# EAGLE board SmallBatSAO (EAGLE 9.1.0)
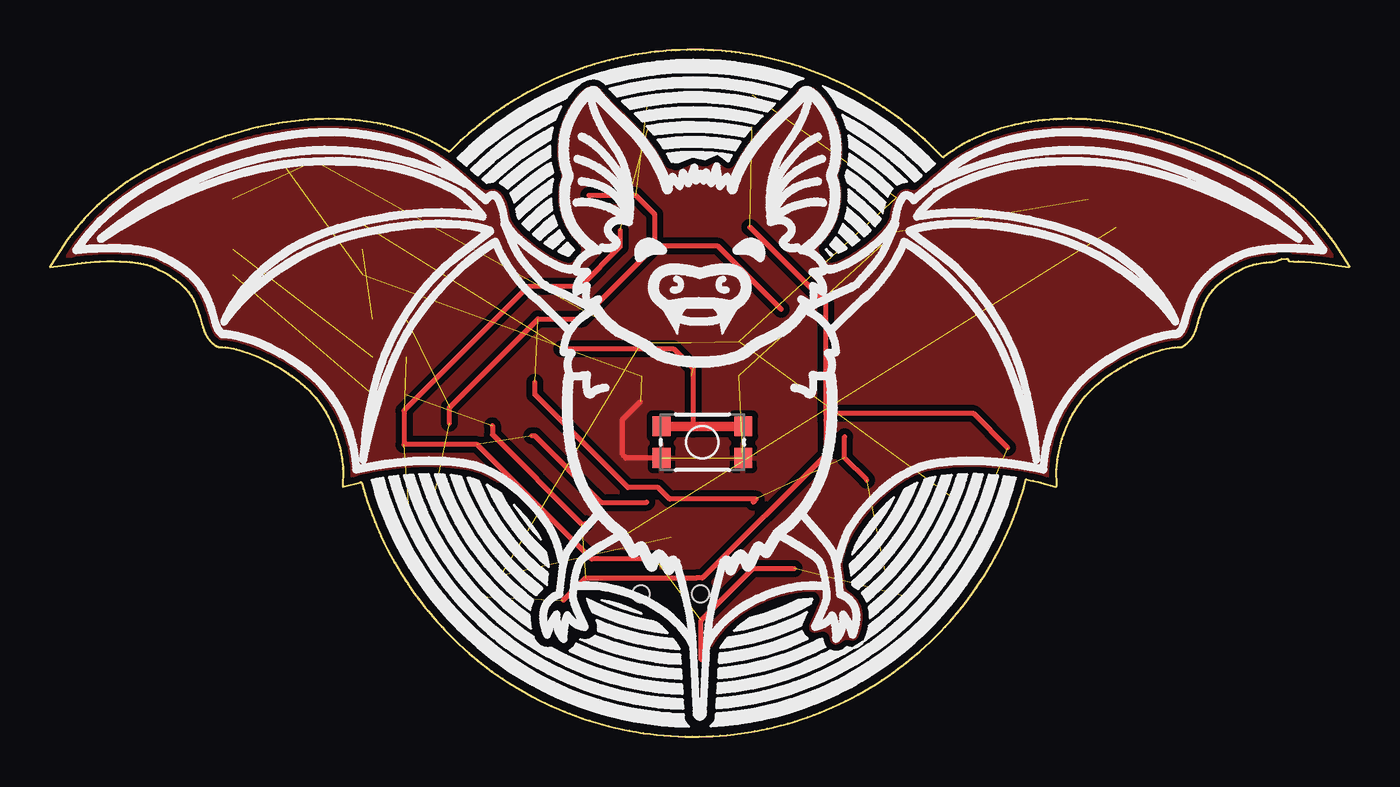
[diagram p0: board, top side]
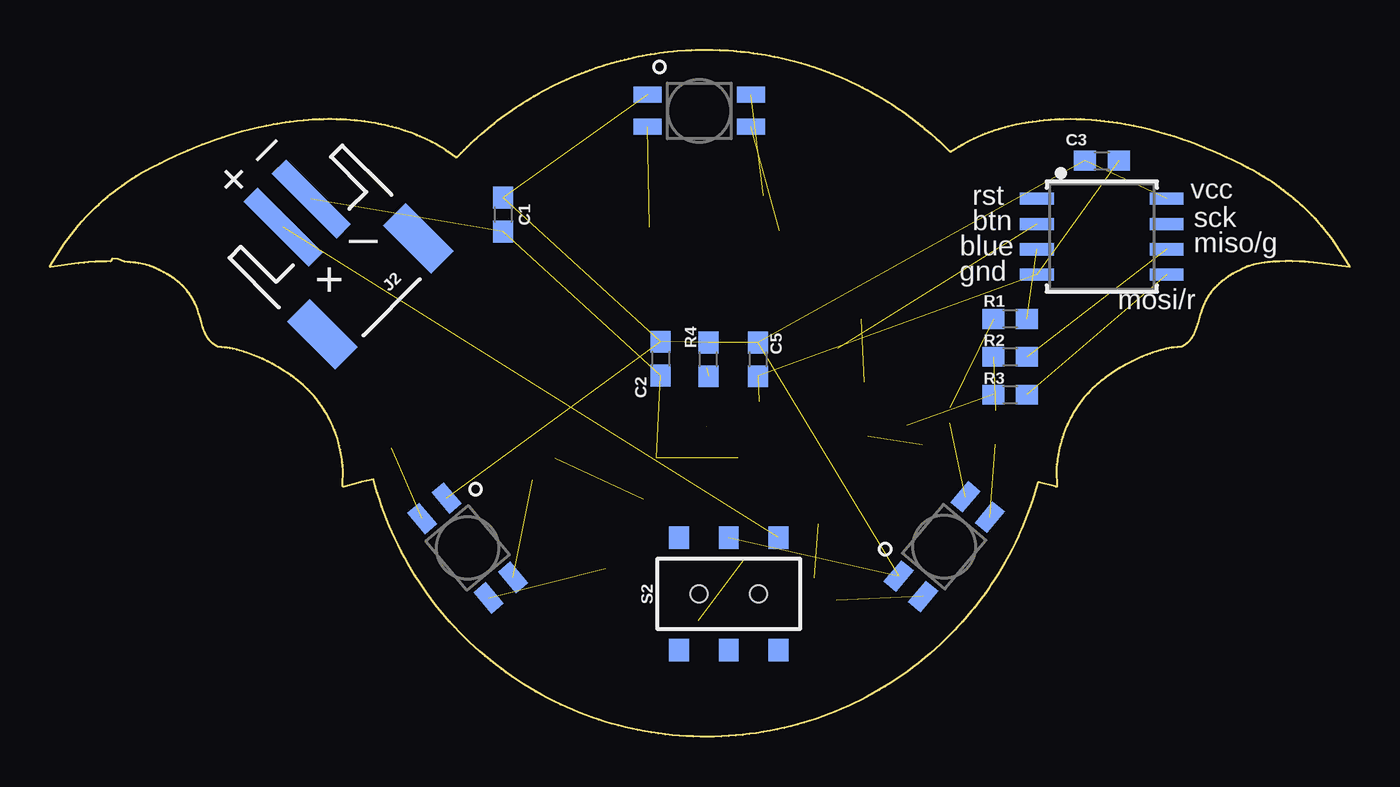
[diagram p1: board, bottom side, seen from below]

Size 65.26 x 34.5 mm. Coordinates in mm from the lower left corner, seen from the top.
Outline: 64.5,24.79 64.42,24.91 64.34,25.03 64.17,25.25 64,25.47 63.82,25.69 63.63,25.9 63.44,26.11 63.24,26.31 63.15,26.41 62.99,26.56 62.79,26.75 62.58,26.94 62.36,27.13 62.25,27.22 62.09,27.35 61.87,27.52 61.64,27.69 61.41,27.85 61.17,28.01 60.93,28.16 60.69,28.3 60.44,28.44 60.13,28.6 59.75,28.79 59.37,28.98 58.99,29.16 58.67,29.3 58.35,29.44 58.02,29.58 57.63,29.74 57.3,29.86 56.9,30 56.63,30.09 56.3,30.2 56.03,30.29 55.62,30.4 55.21,30.51 54.8,30.61 54.38,30.7 54.04,30.76 53.83,30.8 53.62,30.84 53.41,30.87 53.2,30.9 52.85,30.94 52.5,30.97 52.29,30.99 52.08,31 51.73,31.02 51.51,31.03 51.3,31.03 51.09,31.03 50.88,31.02 50.67,31.02 50.53,31.01 50.39,31 50.17,30.99 49.96,30.97 49.82,30.96 49.61,30.93 49.47,30.92 49.26,30.89 49.12,30.86 48.92,30.83 48.78,30.8 48.64,30.77 48.43,30.73 48.29,30.7 48.09,30.65 47.88,30.59 47.75,30.55 47.61,30.51 47.41,30.44 47.15,30.35 46.95,30.28 46.82,30.22 46.69,30.17 46.49,30.08 46.3,29.99 46.18,29.93 46.05,29.87 45.93,29.8 45.8,29.73 45.68,29.66 45.5,29.55 45.38,29.47 45.26,29.39 45.15,29.31 45.04,29.23 44.87,29.1 44.82,29.12 44.62,29.32 44.47,29.47 44.32,29.62 44.12,29.81 43.96,29.96 43.8,30.1 43.59,30.29 43.43,30.42 43.27,30.56 43.1,30.69 42.94,30.82 42.77,30.95 42.6,31.08 42.43,31.21 42.2,31.37 42.03,31.49 41.85,31.61 41.68,31.73 41.5,31.84 41.32,31.95 41.14,32.06 40.96,32.17 40.71,32.31 40.53,32.41 40.28,32.55 40.09,32.64 39.9,32.74 39.71,32.83 39.52,32.92 39.33,33.01 39.13,33.09 38.94,33.18 38.74,33.26 38.54,33.33 38.35,33.41 38.15,33.48 37.88,33.58 37.68,33.64 37.48,33.71 37.28,33.77 37.07,33.83 36.8,33.91 36.6,33.96 36.39,34.01 36.19,34.06 35.98,34.11 35.7,34.17 35.5,34.21 35.29,34.24 35.08,34.28 34.87,34.31 34.66,34.34 34.45,34.37 34.24,34.39 33.96,34.42 33.75,34.44 33.33,34.47 33.04,34.49 32.83,34.49 32.62,34.5 32.41,34.5 32.2,34.5 31.99,34.5 31.63,34.49 31.42,34.48 31.21,34.47 30.93,34.45 30.79,34.43 30.58,34.41 30.37,34.39 30.16,34.37 29.95,34.34 29.74,34.31 29.53,34.28 29.32,34.24 29.11,34.2 28.9,34.16 28.7,34.12 28.49,34.07 28.28,34.03 28.08,33.97 27.87,33.92 27.53,33.83 27.33,33.77 27.13,33.7 26.93,33.64 26.73,33.57 26.53,33.5 26.33,33.43 26.13,33.35 25.93,33.28 25.74,33.2 25.54,33.12 25.22,32.97 25.03,32.88 24.84,32.79 24.65,32.7 24.46,32.6 24.21,32.47 24.02,32.37 23.71,32.2 23.53,32.09 23.35,31.98 23.17,31.87 22.99,31.76 22.81,31.64 22.64,31.52 22.46,31.4 22.29,31.28 22.12,31.16 21.95,31.03 21.67,30.82 21.45,30.64 21.34,30.55 21.18,30.41 21.02,30.28 20.75,30.04 20.6,29.9 20.39,29.71 20.24,29.56 20.09,29.41 20.04,29.38 19.92,29.45 19.8,29.53 19.62,29.64 19.5,29.71 19.38,29.78 19.19,29.88 19,29.98 18.88,30.04 18.62,30.16 18.43,30.24 18.29,30.29 18.16,30.34 17.96,30.41 17.76,30.48 17.63,30.52 17.42,30.58 17.29,30.62 17.15,30.65 16.95,30.71 16.74,30.75 16.6,30.78 16.46,30.81 16.26,30.85 16.12,30.87 15.91,30.9 15.56,30.95 15.35,30.97 15.14,30.99 15,31 14.78,31.01 14.57,31.02 14.36,31.03 14.01,31.03 13.73,31.02 13.51,31.02 13.3,31.01 12.95,30.99 12.74,30.97 12.53,30.95 12.32,30.93 12.11,30.9 11.9,30.87 11.69,30.84 11.48,30.81 11.27,30.77 11.06,30.73 10.86,30.69 10.44,30.6 10.03,30.5 9.62,30.39 9.28,30.3 9.01,30.21 8.81,30.15 8.41,30.02 8.08,29.9 7.68,29.75 7.29,29.59 6.9,29.43 6.51,29.26 6.19,29.12 5.93,29 5.74,28.9 5.43,28.75 5.11,28.59 4.8,28.42 4.55,28.28 4.31,28.14 4.07,27.99 3.9,27.87 3.78,27.79 3.55,27.63 3.32,27.46 3.1,27.29 2.94,27.15 2.83,27.06 2.62,26.88 2.51,26.78 2.36,26.64 2.15,26.44 2.05,26.34 1.91,26.19 1.76,26.04 1.67,25.93 1.57,25.83 1.43,25.67 1.3,25.51 1.16,25.34 1.08,25.23 0.95,25.06 0.83,24.89 0.75,24.77 0.03,23.64 0,23.59 1.4,23.77 1.61,23.8 1.82,23.82 2.03,23.84 2.24,23.85 2.52,23.87 2.88,23.88 3.23,23.88 3.51,23.87 3.72,23.86 3.86,23.85 4,23.84 4.14,23.83 4.28,23.81 4.42,23.79 4.56,23.77 4.7,23.74 4.84,23.71 4.91,23.69 5.04,23.65 5.11,23.63 5.17,23.6 5.24,23.57 5.3,23.54 5.37,23.51 5.49,23.45 5.68,23.35 5.86,23.25 5.98,23.18 6.1,23.1 6.22,23.02 6.28,22.98 6.33,22.94 6.44,22.85 6.55,22.76 6.65,22.67 6.75,22.57 6.8,22.51 6.85,22.46 6.94,22.35 7.02,22.24 7.06,22.18 7.14,22.06 7.17,22 7.24,21.88 7.27,21.81 7.3,21.75 7.36,21.62 7.38,21.55 7.43,21.42 7.47,21.29 7.52,21.15 7.63,20.74 7.69,20.54 7.74,20.41 7.77,20.34 7.79,20.28 7.82,20.22 7.86,20.15 7.89,20.09 7.93,20.03 7.97,19.97 8.01,19.92 8.06,19.87 8.11,19.82 8.16,19.77 8.22,19.72 8.27,19.68 8.39,19.6 8.45,19.58 8.67,19.57 8.81,19.55 8.95,19.54 9.08,19.51 9.22,19.49 9.36,19.45 9.5,19.42 9.7,19.36 9.9,19.29 10.03,19.25 10.17,19.2 10.43,19.09 10.69,18.97 10.94,18.85 11.13,18.75 11.25,18.69 11.37,18.62 11.56,18.51 11.74,18.4 11.85,18.32 11.97,18.24 12.15,18.12 12.26,18.04 12.37,17.95 12.48,17.87 12.59,17.78 12.7,17.69 12.81,17.59 12.91,17.49 13.01,17.4 13.15,17.24 13.25,17.14 13.34,17.03 13.47,16.86 13.56,16.75 13.68,16.58 13.75,16.46 13.86,16.28 13.93,16.16 14,16.03 14.1,15.84 14.16,15.72 14.21,15.59 14.29,15.39 14.37,15.19 14.41,15.06 14.45,14.92 14.51,14.72 14.57,14.52 14.6,14.38 14.64,14.17 14.67,13.96 14.69,13.82 14.7,13.68 14.72,13.54 14.72,13.47 14.72,13.4 14.71,12.55 14.78,12.56 15.59,12.78 15.65,12.78 15.75,12.44 15.85,12.11 15.96,11.77 16.07,11.44 16.2,11.11 16.33,10.78 16.46,10.45 16.55,10.26 16.63,10.07 16.78,9.75 16.94,9.43 17.11,9.12 17.21,8.93 17.31,8.75 17.49,8.44 17.67,8.14 17.86,7.84 17.98,7.67 18.1,7.49 18.3,7.2 18.51,6.92 18.72,6.64 18.85,6.47 18.99,6.31 19.21,6.04 19.45,5.77 19.68,5.51 19.83,5.36 19.98,5.21 20.23,4.96 20.38,4.81 20.53,4.66 20.79,4.43 21.06,4.19 21.32,3.96 21.49,3.83 21.65,3.7 21.93,3.48 22.22,3.27 22.5,3.07 22.74,2.91 23.03,2.72 23.33,2.53 23.63,2.35 23.94,2.17 24.25,2 24.56,1.84 24.88,1.69 25.2,1.54 25.52,1.39 25.85,1.26 26.11,1.15 26.44,1.03 26.77,0.91 27.11,0.8 27.38,0.72 27.72,0.62 28.06,0.53 28.4,0.45 28.74,0.37 29.09,0.3 29.44,0.24 29.79,0.19 30.14,0.14 30.49,0.1 30.84,0.06 31.19,0.04 31.54,0.02 31.89,0.01 32.25,0 32.6,0 32.95,0.01 33.3,0.03 33.66,0.05 34.01,0.08 34.36,0.12 34.71,0.17 35.06,0.22 35.4,0.28 35.75,0.34 36.03,0.4 36.37,0.48 36.71,0.57 37.05,0.66 37.39,0.76 37.73,0.87 38.06,0.98 38.33,1.08 38.65,1.21 38.98,1.34 39.3,1.48 39.63,1.63 39.94,1.78 40.26,1.94 40.57,2.11 40.88,2.28 41.18,2.46 41.48,2.64 41.78,2.84 42.07,3.03 42.36,3.24 42.59,3.4 42.87,3.62 43.14,3.83 43.42,4.06 43.68,4.29 43.95,4.52 44.2,4.77 44.46,5.01 44.7,5.26 44.95,5.52 45.18,5.78 45.42,6.04 45.55,6.21 45.69,6.37 45.91,6.65 46.12,6.93 46.33,7.21 46.53,7.5 46.73,7.79 46.92,8.09 47.11,8.39 47.29,8.69 47.46,9 47.62,9.31 47.78,9.63 47.94,9.94 48.08,10.26 48.22,10.59 48.36,10.91 48.48,11.24 48.6,11.58 48.72,11.91 48.82,12.25 48.92,12.58 49.01,12.92 49.36,12.85 49.63,12.79 49.77,12.76 50.52,12.56 50.56,12.58 50.55,13.43 50.56,13.57 50.56,13.64 50.58,13.78 50.59,13.92 50.61,14.06 50.65,14.27 50.68,14.41 50.73,14.61 50.76,14.75 50.82,14.95 50.89,15.15 50.94,15.28 50.99,15.42 51.07,15.61 51.15,15.81 51.22,15.93 51.28,16.06 51.35,16.18 51.46,16.36 51.53,16.48 51.61,16.6 51.73,16.77 51.82,16.89 51.9,17 51.99,17.11 52.09,17.21 52.23,17.37 52.33,17.47 52.43,17.56 52.54,17.66 52.65,17.75 52.81,17.88 52.92,17.97 53.03,18.06 53.15,18.14 53.32,18.26 53.5,18.38 53.62,18.45 53.8,18.56 53.92,18.63 54.11,18.73 54.23,18.8 54.36,18.86 54.48,18.93 54.61,18.99 54.74,19.04 54.87,19.1 55,19.15 55.13,19.21 55.26,19.25 55.4,19.3 55.53,19.35 55.73,19.41 55.87,19.44 56.07,19.49 56.21,19.52 56.35,19.54 56.49,19.56 56.63,19.57 56.84,19.58 57.02,19.7 57.07,19.74 57.13,19.79 57.18,19.84 57.23,19.89 57.27,19.94 57.32,20 57.35,20.06 57.39,20.12 57.43,20.18 57.46,20.24 57.49,20.31 57.51,20.37 57.54,20.44 57.59,20.57 57.65,20.77 57.72,21.04 57.78,21.25 57.85,21.45 57.9,21.58 57.92,21.65 57.95,21.71 58.01,21.84 58.04,21.9 58.11,22.03 58.18,22.15 58.26,22.26 58.31,22.32 58.39,22.43 58.44,22.48 58.54,22.59 58.59,22.64 58.64,22.69 58.74,22.78 58.85,22.87 58.96,22.96 59.02,23 59.13,23.08 59.25,23.16 59.37,23.23 59.56,23.33 59.68,23.4 59.81,23.46 59.87,23.49 59.93,23.53 59.99,23.56 60.06,23.58 60.19,23.63 60.26,23.66 60.39,23.7 60.46,23.71 60.6,23.75 60.8,23.78 60.94,23.8 61.08,23.82 61.22,23.84 61.37,23.85 61.51,23.86 61.84,24 62.13,24 62.21,23.88 62.42,23.88 62.7,23.87 62.99,23.85 63.34,23.83 63.55,23.81 63.83,23.78 65.23,23.59 65.26,23.61 64.5,24.79
Copper layers (1*16): Top 0.035mm / dielectric 1.5mm / Bottom 0.035mm
Design rules "SparkFun-2-layer-TIGHT": minimum track width 7mil, minimum drill 15mil, track to track 7mil, track to pad 7mil, pad to pad 7mil, via to via 7mil, smd to smd 7mil, copper to edge 7mil, drill to drill 7mil, minimum pad ring 7mil, minimum via ring 7mil, stop-mask expansion 4mil, vias tented up to drill 25mil, thermal gap 10mil
tRestrict: area 40.8,31.1 to 42.6,32.2; area 22,31.1 to 23.4,32; area 39,24.2 to 40.4,24.7; area 23.7,32.2 to 25.3,33; area 20.8,30 to 21.4,30.6; area 39.3,31.1 to 40.8,32.2; area 29.2,31.1 to 31.1,32.2; area 31.1,31.1 to 33.1,32.2; area 25.3,25.8 to 25.4,26.1; area 33.1,31.1 to 35,32.2; area 25.3,28.2 to 25.3,28.2; area 28.5,31.4 to 29.2,32.2; area 40.8,30 to 42.8,31.1; area 21.4,30 to 23.4,31.1; area 35,31.1 to 36.8,32.2; area 25.3,31.1 to 26,32.2; area 23.4,31.1 to 25.3,32.2; area 39.9,30 to 40.8,31.1; area 38.9,32.2 to 40.8,33.2; area 35,30.3 to 35.7,31.1; area 40.8,32.2 to 41,32.2; area 42.8,30 to 43.9,30.9; area 25.3,30.8 to 25.4,31.1; area 23.4,30 to 25.3,31.1; area 31.1,30 to 33.1,31.1; area 33.1,30 to 35,31.1; area 44.7,29 to 44.8,29.2; area 29.6,30 to 31.1,31.1; area 37,33.2 to 38.8,33.9; area 40,26.9 to 40.8,27.9; area 42.8,27.9 to 44.7,29; area 40.8,25.8 to 42,26.9; area 40.8,26.9 to 42.8,27.9; area 21.4,29 to 23.4,30; area 20.1,29 to 21.4,30; area 20.6,28.2 to 21.4,29; area 23.4,26.9 to 25.3,27.9; area 25.3,32.2 to 27.3,33.2; area 25.8,33.2 to 27.3,33.7; area 31.1,34.3 to 33.1,34.5; area 21.8,26.9 to 23.4,27.9; area 35,33.2 to 37,34.3; area 35,34.3 to 35.1,34.3; area 33.1,34.3 to 35,34.5; area 25.3,24.7 to 26.1,25.8; area 23.7,24.7 to 25.3,25.8; area 42.8,29 to 44.7,30; area 42.8,27.8 to 43.5,27.9; area 40.8,29 to 42.8,30; area 23.4,29 to 25.2,30; area 21.4,27.9 to 23.4,29; area 40.8,27.9 to 42.8,29; area 30.5,29 to 31.1,30; area 40.8,25.1 to 41.6,25.8; area 39.2,24.7 to 40.8,25.8; area 40.1,29 to 40.8,30; area 33.1,29 to 34.8,30; area 31.1,29 to 33.1,30; area 31.1,29 to 31.1,29; area 39.9,27.9 to 40.8,29; area 25.3,24.2 to 26.3,24.7; area 23.4,25.8 to 25.3,26.9; area 24.9,24.5 to 25.3,24.7; area 34,28.9 to 34.1,29; area 35,32.2 to 37,33.2; area 31.2,28.8 to 31.9,29; area 39.8,25.8 to 40.8,26.9; area 23.3,26.6 to 23.4,26.9; area 33.1,33.2 to 35,34.3; area 37,32.3 to 38.9,33.2; area 33.1,32.2 to 35,33.2; area 27.3,32.2 to 29.2,33.2; area 31.1,32.2 to 33.1,33.2; area 29.2,33.2 to 31.1,34.3; area 29.2,32.2 to 31.1,33.2; area 29.5,34.3 to 31.1,34.5; area 27.3,33.2 to 29.2,34.2; area 23.4,27.9 to 25.3,29; area 31.1,33.2 to 33.1,34.3; area 40.8,3.6 to 42.8,4.6; area 42.8,3.6 to 44,4.6; area 44.7,7.8 to 46.7,8.9; area 35,3.6 to 37,4.6; area 42.8,7.8 to 44.7,8.9; area 19.5,4.6 to 21.4,5.7; area 46.7,7.8 to 47.4,8.9; area 38.9,3.6 to 40.8,4.6; area 37,3.6 to 38.9,4.6; area 40.8,7.8 to 42.8,8.9; area 19.5,5.7 to 21.4,6.8; area 33.6,3.6 to 35,4.6; area 17.6,7.8 to 19.5,8.9; area 21.4,5.7 to 23.4,6.8; area 27.3,5.7 to 29.2,6.8; area 29.2,5.7 to 30.5,6.4; area 23.4,5.7 to 24.2,6.8; area 19.5,7.8 to 21.4,8.9; area 15.6,12 to 17.6,13.1; area 27.3,3.6 to 29.2,4.6; area 29.2,3.6 to 31.1,4.6; area 31.1,3.6 to 31.7,4.6; area 21.4,7.8 to 23.4,8.9; area 23.4,3.6 to 25.3,4.6; area 23.4,7.8 to 25.1,8.9; area 21.4,3.6 to 23.4,4.6; area 25.3,3.6 to 27.3,4.6; area 17.9,6.8 to 19.5,7.8; area 40.8,6.8 to 42.8,7.8; area 35,0.4 to 37,1.5; area 19.5,6.8 to 21.4,7.8; area 21.4,6.8 to 23.4,7.8; area 42.8,6.8 to 44.7,7.8; area 44.7,5.3 to 45.1,5.7; area 44.7,6.8 to 46.7,7.8; area 27.3,6.8 to 28.3,6.9; area 27,6.8 to 27.3,6.9; area 25.4,0.8 to 27.3,1.5; area 27,6.2 to 27.3,6.8; area 42.8,3.6 to 42.8,3.6; area 23.4,6.8 to 25,7.8; area 40.8,2.3 to 41.3,2.5; area 37,6.8 to 38.3,6.9; area 20.6,3.9 to 21.4,4.6; area 31.1,0 to 33.1,0.4; area 29.2,0 to 31.1,0.4; area 46.7,9.9 to 48.4,11; area 17.6,9.9 to 19.5,11; area 18.6,5.7 to 19.5,6.8; area 35,0.2 to 36,0.4; area 42.4,12 to 42.8,12.3; area 33.1,0 to 35,0.4; area 28.6,0.3 to 29.2,0.4; area 40.3,7.1 to 40.8,7.8; area 46.7,7.7 to 46.7,7.8; area 17.3,8.3 to 17.6,8.9; area 46.7,13.1 to 47.8,13.2; area 27.3,0.4 to 29.2,1.5; area 17.5,13.1 to 17.5,13.1; area 40.1,7.8 to 40.8,8.9; area 44.7,9.9 to 46.7,11; area 42.8,9.9 to 44.7,11; area 44.8,13.1 to 46.7,13.2; area 40.8,9.9 to 42.8,11; area 44.7,11 to 46.7,12; area 21.4,8.9 to 23.4,9.9; area 21.4,9.9 to 23.4,11; area 19.5,9.9 to 21.4,11; area 23.4,9.9 to 24.6,11; area 40.6,9.9 to 40.8,10.3; area 17.6,12 to 19.5,13.1; area 17.6,8.9 to 19.5,9.9; area 40.8,2.5 to 42.8,3.6; area 16.7,8.9 to 17.6,9.9; area 17.6,13.1 to 19.5,13.2; area 38.9,2.5 to 40.8,3.6; area 19.5,8.9 to 21.4,9.9; area 17.6,11 to 19.5,12; area 19.5,11 to 21.4,12; area 15.9,11 to 17.6,12; area 16.3,9.9 to 17.6,11; area 44.7,12 to 46.7,13.1; area 33.8,4.6 to 35,5.7; area 31.1,4.6 to 31.5,5.1; area 42.8,11 to 44.7,12; area 29.2,4.6 to 31.1,5.7; area 42.8,12 to 44.7,13.1; area 27.3,4.6 to 29.2,5.7; area 21.4,4.6 to 23.4,5.7; area 23.4,4.6 to 24.5,5.7; area 26.4,4.6 to 27.3,5; area 41.4,11 to 42.8,12; area 19.5,13.1 to 20.4,13.2; area 21.4,11 to 23.4,12; area 23.4,11 to 23.9,11.6; area 35,4.6 to 37,5.7; area 19.5,12 to 21.4,13.1; area 21.4,12 to 22.8,12.9; area 37,4.6 to 38.9,5.7; area 42.8,4.6 to 44.7,5.7; area 40.7,4.6 to 40.8,4.7; area 40.8,4.6 to 42.8,5.7; area 40.2,8.9 to 40.8,9.9; area 46.7,12 to 48.6,13.1; area 29.2,0.4 to 31.1,1.5; area 44.7,5.7 to 46,6.8; area 33.1,0.4 to 35,1.5; area 33,0.4 to 33.1,0.4; area 31.1,0.4 to 32.2,1.5; area 23.4,1.5 to 25.3,2.5; area 23.4,2.5 to 23.4,2.5; area 23.4,2.5 to 25.3,3.6; area 48.6,12 to 49,13; area 21.8,2.5 to 23.4,3.6; area 34.8,5.7 to 35,5.9; area 37,5.7 to 38.2,6.8; area 35,5.7 to 37,6.7; area 38.9,1.3 to 39.2,1.5; area 37,0.6 to 38.9,1.5; area 35,1.5 to 37,2.5; area 37,1.5 to 38.9,2.5; area 33.5,1.5 to 35,2.5; area 41,5.7 to 42.8,6.8; area 42.8,5.7 to 44.7,6.8; area 25.3,1.5 to 27.3,2.5; area 44.7,8.9 to 46.7,9.9; area 40.8,8.9 to 42.8,9.9; area 42.8,8.9 to 44.7,9.9; area 46.7,8.9 to 47.9,9.9; area 33.5,2.5 to 35,3.6; area 35,2.5 to 37,3.6; area 38.9,1.5 to 40.8,2.5; area 25.3,2.5 to 27.3,3.6; area 23.4,8.9 to 25,9.9; area 37,2.5 to 38.9,3.6; area 48.6,11.6 to 48.8,12; area 29.2,1.5 to 31.1,2.5; area 46.7,11 to 48.6,12; area 31.1,2.5 to 31.8,3.6; area 27.3,1.5 to 29.2,2.5; area 29.2,2.5 to 31.1,3.6; area 31.1,1.5 to 31.8,2.5; area 27.3,2.5 to 29.2,3.6; area 49.3,12.8 to 49.7,12.9; area 40.8,31.1 to 42.6,32.2; area 22,31.1 to 23.4,32; area 39,24.2 to 40.4,24.7; area 23.7,32.2 to 25.3,33; area 20.8,30 to 21.4,30.6; area 39.3,31.1 to 40.8,32.2; area 29.2,31.1 to 31.1,32.2; area 31.1,31.1 to 33.1,32.2; area 25.3,25.8 to 25.4,26.1; area 33.1,31.1 to 35,32.2; area 25.3,28.2 to 25.3,28.2; area 28.5,31.4 to 29.2,32.2; area 40.8,30 to 42.8,31.1; area 21.4,30 to 23.4,31.1; area 35,31.1 to 36.8,32.2; area 25.3,31.1 to 26,32.2; area 23.4,31.1 to 25.3,32.2; area 39.9,30 to 40.8,31.1; area 38.9,32.2 to 40.8,33.2; area 35,30.3 to 35.7,31.1; area 40.8,32.2 to 41,32.2; area 42.8,30 to 43.9,30.9; area 25.3,30.8 to 25.4,31.1; area 23.4,30 to 25.3,31.1; area 31.1,30 to 33.1,31.1; area 33.1,30 to 35,31.1; area 44.7,29 to 44.8,29.2; area 29.6,30 to 31.1,31.1; area 37,33.2 to 38.8,33.9; area 40,26.9 to 40.8,27.9; area 42.8,27.9 to 44.7,29; area 40.8,25.8 to 42,26.9; area 40.8,26.9 to 42.8,27.9; area 21.4,29 to 23.4,30; area 20.1,29 to 21.4,30; area 20.6,28.2 to 21.4,29; area 23.4,26.9 to 25.3,27.9; area 25.3,32.2 to 27.3,33.2; area 25.8,33.2 to 27.3,33.7; area 31.1,34.3 to 33.1,34.5; area 21.8,26.9 to 23.4,27.9; area 35,33.2 to 37,34.3; area 35,34.3 to 35.1,34.3; area 33.1,34.3 to 35,34.5; area 25.3,24.7 to 26.1,25.8; area 23.7,24.7 to 25.3,25.8; area 42.8,29 to 44.7,30; area 42.8,27.8 to 43.5,27.9; area 40.8,29 to 42.8,30; area 23.4,29 to 25.2,30; area 21.4,27.9 to 23.4,29; area 40.8,27.9 to 42.8,29; area 30.5,29 to 31.1,30; area 40.8,25.1 to 41.6,25.8; area 39.2,24.7 to 40.8,25.8; area 40.1,29 to 40.8,30; area 33.1,29 to 34.8,30; area 31.1,29 to 33.1,30; area 31.1,29 to 31.1,29; area 39.9,27.9 to 40.8,29; area 25.3,24.2 to 26.3,24.7; area 23.4,25.8 to 25.3,26.9; area 24.9,24.5 to 25.3,24.7; area 34,28.9 to 34.1,29; area 35,32.2 to 37,33.2; area 31.2,28.8 to 31.9,29; area 39.8,25.8 to 40.8,26.9; area 23.3,26.6 to 23.4,26.9; area 33.1,33.2 to 35,34.3; area 37,32.3 to 38.9,33.2; area 33.1,32.2 to 35,33.2; area 27.3,32.2 to 29.2,33.2; area 31.1,32.2 to 33.1,33.2; area 29.2,33.2 to 31.1,34.3; area 29.2,32.2 to 31.1,33.2; area 29.5,34.3 to 31.1,34.5; area 27.3,33.2 to 29.2,34.2; area 23.4,27.9 to 25.3,29; area 31.1,33.2 to 33.1,34.3; area 40.8,3.6 to 42.8,4.6; area 42.8,3.6 to 44,4.6; area 44.7,7.8 to 46.7,8.9; area 35,3.6 to 37,4.6; area 42.8,7.8 to 44.7,8.9; area 19.5,4.6 to 21.4,5.7; area 46.7,7.8 to 47.4,8.9; area 38.9,3.6 to 40.8,4.6; area 37,3.6 to 38.9,4.6; area 40.8,7.8 to 42.8,8.9; area 19.5,5.7 to 21.4,6.8; area 33.6,3.6 to 35,4.6; area 17.6,7.8 to 19.5,8.9; area 21.4,5.7 to 23.4,6.8; area 27.3,5.7 to 29.2,6.8; area 29.2,5.7 to 30.5,6.4; area 23.4,5.7 to 24.2,6.8; area 19.5,7.8 to 21.4,8.9; area 15.6,12 to 17.6,13.1; area 27.3,3.6 to 29.2,4.6; area 29.2,3.6 to 31.1,4.6; area 31.1,3.6 to 31.7,4.6; area 21.4,7.8 to 23.4,8.9; area 23.4,3.6 to 25.3,4.6; area 23.4,7.8 to 25.1,8.9; area 21.4,3.6 to 23.4,4.6; area 25.3,3.6 to 27.3,4.6; area 17.9,6.8 to 19.5,7.8; area 40.8,6.8 to 42.8,7.8; area 35,0.4 to 37,1.5; area 19.5,6.8 to 21.4,7.8; area 21.4,6.8 to 23.4,7.8; area 42.8,6.8 to 44.7,7.8; area 44.7,5.3 to 45.1,5.7; area 44.7,6.8 to 46.7,7.8; area 27.3,6.8 to 28.3,6.9; area 27,6.8 to 27.3,6.9; area 25.4,0.8 to 27.3,1.5; area 27,6.2 to 27.3,6.8; area 42.8,3.6 to 42.8,3.6; area 23.4,6.8 to 25,7.8; area 40.8,2.3 to 41.3,2.5; area 37,6.8 to 38.3,6.9; area 20.6,3.9 to 21.4,4.6; area 31.1,0 to 33.1,0.4; area 29.2,0 to 31.1,0.4; area 46.7,9.9 to 48.4,11; area 17.6,9.9 to 19.5,11; area 18.6,5.7 to 19.5,6.8; area 35,0.2 to 36,0.4; area 42.4,12 to 42.8,12.3; area 33.1,0 to 35,0.4; area 28.6,0.3 to 29.2,0.4; area 40.3,7.1 to 40.8,7.8; area 46.7,7.7 to 46.7,7.8; area 17.3,8.3 to 17.6,8.9; area 46.7,13.1 to 47.8,13.2; area 27.3,0.4 to 29.2,1.5; area 17.5,13.1 to 17.5,13.1; area 40.1,7.8 to 40.8,8.9; area 44.7,9.9 to 46.7,11; area 42.8,9.9 to 44.7,11; area 44.8,13.1 to 46.7,13.2; area 40.8,9.9 to 42.8,11; area 44.7,11 to 46.7,12; area 21.4,8.9 to 23.4,9.9; area 21.4,9.9 to 23.4,11; area 19.5,9.9 to 21.4,11; area 23.4,9.9 to 24.6,11; area 40.6,9.9 to 40.8,10.3; area 17.6,12 to 19.5,13.1; area 17.6,8.9 to 19.5,9.9; area 40.8,2.5 to 42.8,3.6; area 16.7,8.9 to 17.6,9.9; area 17.6,13.1 to 19.5,13.2; area 38.9,2.5 to 40.8,3.6; area 19.5,8.9 to 21.4,9.9; area 17.6,11 to 19.5,12; area 19.5,11 to 21.4,12; area 15.9,11 to 17.6,12; area 16.3,9.9 to 17.6,11; area 44.7,12 to 46.7,13.1; area 33.8,4.6 to 35,5.7; area 31.1,4.6 to 31.5,5.1; area 42.8,11 to 44.7,12; area 29.2,4.6 to 31.1,5.7; area 42.8,12 to 44.7,13.1; area 27.3,4.6 to 29.2,5.7; area 21.4,4.6 to 23.4,5.7; area 23.4,4.6 to 24.5,5.7; area 26.4,4.6 to 27.3,5; area 41.4,11 to 42.8,12; area 19.5,13.1 to 20.4,13.2; area 21.4,11 to 23.4,12; area 23.4,11 to 23.9,11.6; area 35,4.6 to 37,5.7; area 19.5,12 to 21.4,13.1; area 21.4,12 to 22.8,12.9; area 37,4.6 to 38.9,5.7; area 42.8,4.6 to 44.7,5.7; area 40.7,4.6 to 40.8,4.7; area 40.8,4.6 to 42.8,5.7; area 40.2,8.9 to 40.8,9.9; area 46.7,12 to 48.6,13.1; area 29.2,0.4 to 31.1,1.5; area 44.7,5.7 to 46,6.8; area 33.1,0.4 to 35,1.5; area 33,0.4 to 33.1,0.4; area 31.1,0.4 to 32.2,1.5; area 23.4,1.5 to 25.3,2.5; area 23.4,2.5 to 23.4,2.5; area 23.4,2.5 to 25.3,3.6; area 48.6,12 to 49,13; area 21.8,2.5 to 23.4,3.6; area 34.8,5.7 to 35,5.9; area 37,5.7 to 38.2,6.8; area 35,5.7 to 37,6.7; area 38.9,1.3 to 39.2,1.5; area 37,0.6 to 38.9,1.5; area 35,1.5 to 37,2.5; area 37,1.5 to 38.9,2.5; area 33.5,1.5 to 35,2.5; area 41,5.7 to 42.8,6.8; area 42.8,5.7 to 44.7,6.8; area 25.3,1.5 to 27.3,2.5; area 44.7,8.9 to 46.7,9.9; area 40.8,8.9 to 42.8,9.9; area 42.8,8.9 to 44.7,9.9; area 46.7,8.9 to 47.9,9.9; area 33.5,2.5 to 35,3.6; area 35,2.5 to 37,3.6; area 38.9,1.5 to 40.8,2.5; area 25.3,2.5 to 27.3,3.6; area 23.4,8.9 to 25,9.9; area 37,2.5 to 38.9,3.6; area 48.6,11.6 to 48.8,12; area 29.2,1.5 to 31.1,2.5; area 46.7,11 to 48.6,12; area 31.1,2.5 to 31.8,3.6; area 27.3,1.5 to 29.2,2.5; area 29.2,2.5 to 31.1,3.6; area 31.1,1.5 to 31.8,2.5; area 27.3,2.5 to 29.2,3.6; area 49.3,12.8 to 49.7,12.9; area 31.2,30 to 34.2,32.7

## Footprints (pad centres in the part's own frame; a part is rotated, then mirrored left to right if it is on the bottom)
0603 = smd 1.1 x 1: 1 -0.85,0; 2 0.85,0
JST-2-SMD = smd 1 x 4.6: 1 -1,-3.7; 2 1,-3.7 | smd 1.6 x 3.4: NC1 -3.4,1.5; NC2 3.4,1.5
PLCC4_SMD_REVERSE_MOUNT_LED = smd 1.4 x 0.8: P$1 -0.9,-0.5; P$2 -0.9,-2.1; P$3 4.3,-2.1; P$4 4.3,-0.5
TACTILE_SWITCH_SMD_4.6X2.8MM = smd 0.9 x 1: 1 -2.05,-0.8; 2 2.05,-0.8; 3 2.05,0.8; 4 -2.05,0.8
SWITCH_DPDT_SMD_AYZ0202 = smd 1 x 1.15: 1 -2.5,2.825; 2 0,2.825; 3 2.5,2.825; 4 -2.5,-2.825; 5 0,-2.825; 6 2.5,-2.825 | hole 0.85: 1.5,0; -1.5,0
SOIC-8 = smd 0.61 x 1.702: 1 -1.905,-3.251; 2 -0.635,-3.251; 3 0.635,-3.251; 4 1.905,-3.251; 5 1.905,3.251; 6 0.635,3.251; 7 -0.635,3.251; 8 -1.905,3.251

## Placement (x,y rotation side)
C1  0.1uF  [0603]  42.51,26.23 270 bottom
C2  0.1uF  [0603]  34.61,18.99 270 bottom
C3  0.1uF  [0603]  12.45,28.92 0 bottom
C5  0.1uF  [0603]  29.72,18.95 270 bottom
J2  [JST-2-SMD]  50.23,23.69 225 bottom
LED1  [PLCC4_SMD_REVERSE_MOUNT_LED]  22.45,9.08 50 bottom
LED5  [PLCC4_SMD_REVERSE_MOUNT_LED]  44.39,11.62 310 bottom
LED6  [PLCC4_SMD_REVERSE_MOUNT_LED]  34.35,32.73 0 bottom
R1  330  [0603]  17.05,20.99 0 bottom
R2  330  [0603]  17.05,19.08 180 bottom
R3  330  [0603]  17.05,17.18 180 bottom
R4  10k  [0603]  32.19,18.95 90 bottom
S1  MOMENTARY-SWITCH-SPST-SMD-4.6X2.8MM  [TACTILE_SWITCH_SMD_4.6X2.8MM]  32.77,14.8 0 top
S2  [SWITCH_DPDT_SMD_AYZ0202]  31.18,7.18 0 bottom
U$17  ATTINY85_SOIC  [SOIC-8]  12.45,25.11 270 bottom

## Library data of the parts
C1-C3 C5 = SparkFun-Capacitors; PROD_ID: CAP-00810
J2 = SparkFun-Connectors; PROD_ID: CONN-11443; SF_ID: PRT-08612
LED1 LED5 LED6 = PLCC4_reverse-mount_led; DIGIKEYPARTNO: 1497-1257-1-ND; PARTNO: XZMDKCBDDG45S-9
R1-R3 = SparkFun-Resistors; PROD_ID: RES-00818
R4 = SparkFun-Resistors; PROD_ID: RES-00824
S1 = SparkFun-Switches; PROD_ID: SWCH-13065
S2 = SparkFun-Switches; PROD_ID: SWCH-08179; SF_ID: COM-00597
U$17 = ATTiny85

## Nets
B: LED1.P$3 LED5.P$3 LED6.P$3 R2.2
BUTTON: R4.1 S1.3 S1.4 U$17.2
G: LED1.P$2 LED5.P$2 LED6.P$2 R3.2
GND: C1.2 C2.2 C3.2 C5.2 J2.1 S1.1 S1.2 U$17.4
N$1: R2.1 U$17.6
N$3: R3.1 U$17.5
N$10: R1.2 U$17.3
R: LED1.P$4 LED5.P$4 LED6.P$4 R1.1
RESET: U$17.1
SCK: U$17.7
VBATT: J2.2 S2.3
VDD: C1.1 C2.1 C3.1 C5.1 LED1.P$1 LED5.P$1 LED6.P$1 R4.2 S2.2 U$17.8

## Tracks (layer width: path | path; a pad name or v marks a point on that pad's centre or on a via)
B  (6 unrouted)
  Top 0.254: 30.38,8.92 30.23,8.92 27.21,8.92 21.46,14.67 17.78,14.67 17.78,16.38 24,22.61 26.64,22.61 28.64,24.61 28.64,25.43 | 32.7,3.87 32.7,5.84 35.31,8.45 37.37,8.45 | 29.97,11.78 27.68,11.78 24.35,15.11 24.19,15.11
BUTTON  (3 unrouted)
  Top 0.254: 25.84,19.49 25.72,19.49 31.3,19.49 32.28,18.52 32.28,15.59
  Top 0.508: S1.4 30.86,15.6 32.28,15.59 32.29,15.59 S1.3
G  (5 unrouted)
  Top 0.254: 35.15,25.59 38.96,21.78 38.96,16.22 | 25.78,6.86 26.89,7.97 32.45,7.97 32.77,7.97 38.96,14.16 38.96,15.91 38.96,16.22 | 48.1,14.51 46.39,16.22 38.96,16.22 | 22.22,15.62 22.22,15.18 26.7,10.7 26.89,10.7
GND  (7 unrouted)
  Top 0.254: S1.1 28.93,14 28.76,14.16 28.76,15.94 29.65,16.83
  pour Top (isolate 0.305, rank 3): -0.57,35.12 65.47,35.12 65.47,0.98 65.47,-0.44 -0.57,-0.44
N$1  (1 unrouted)
N$3  (1 unrouted)
N$10  (1 unrouted)
R  (6 unrouted)
  Top 0.254: 20.06,15.75 20.06,16.54 24.51,20.99 26.73,20.99 30.38,24.64 | 27.05,27.18 29.43,27.18 30.38,26.23 30.38,24.64 | 41.02,12.89 39.91,14 39.91,15.07 | 36.73,21.46 33.56,24.64 30.38,24.64 | 35.31,11.78 35.46,11.94 31.11,11.94 30.54,12.51 29.02,12.51 24.35,17.18 24.35,17.81
VBATT  (1 unrouted)
VDD  (9 unrouted)

## Text on the board
bPlace: _ | vcc | + | rst | sck | btn | _ | miso/g | blue | gnd | + | mosi/r